# Altium PCB cuong.PcbDoc
Units mil, origin at the board's own origin, x right, y up, seen from the top; angles counter-clockwise.
Board outline 1885 x 2320 mil, 2 copper layers (Top Layer, Bottom Layer); 61 components, 49 nets, 228 pads, 113 vias.
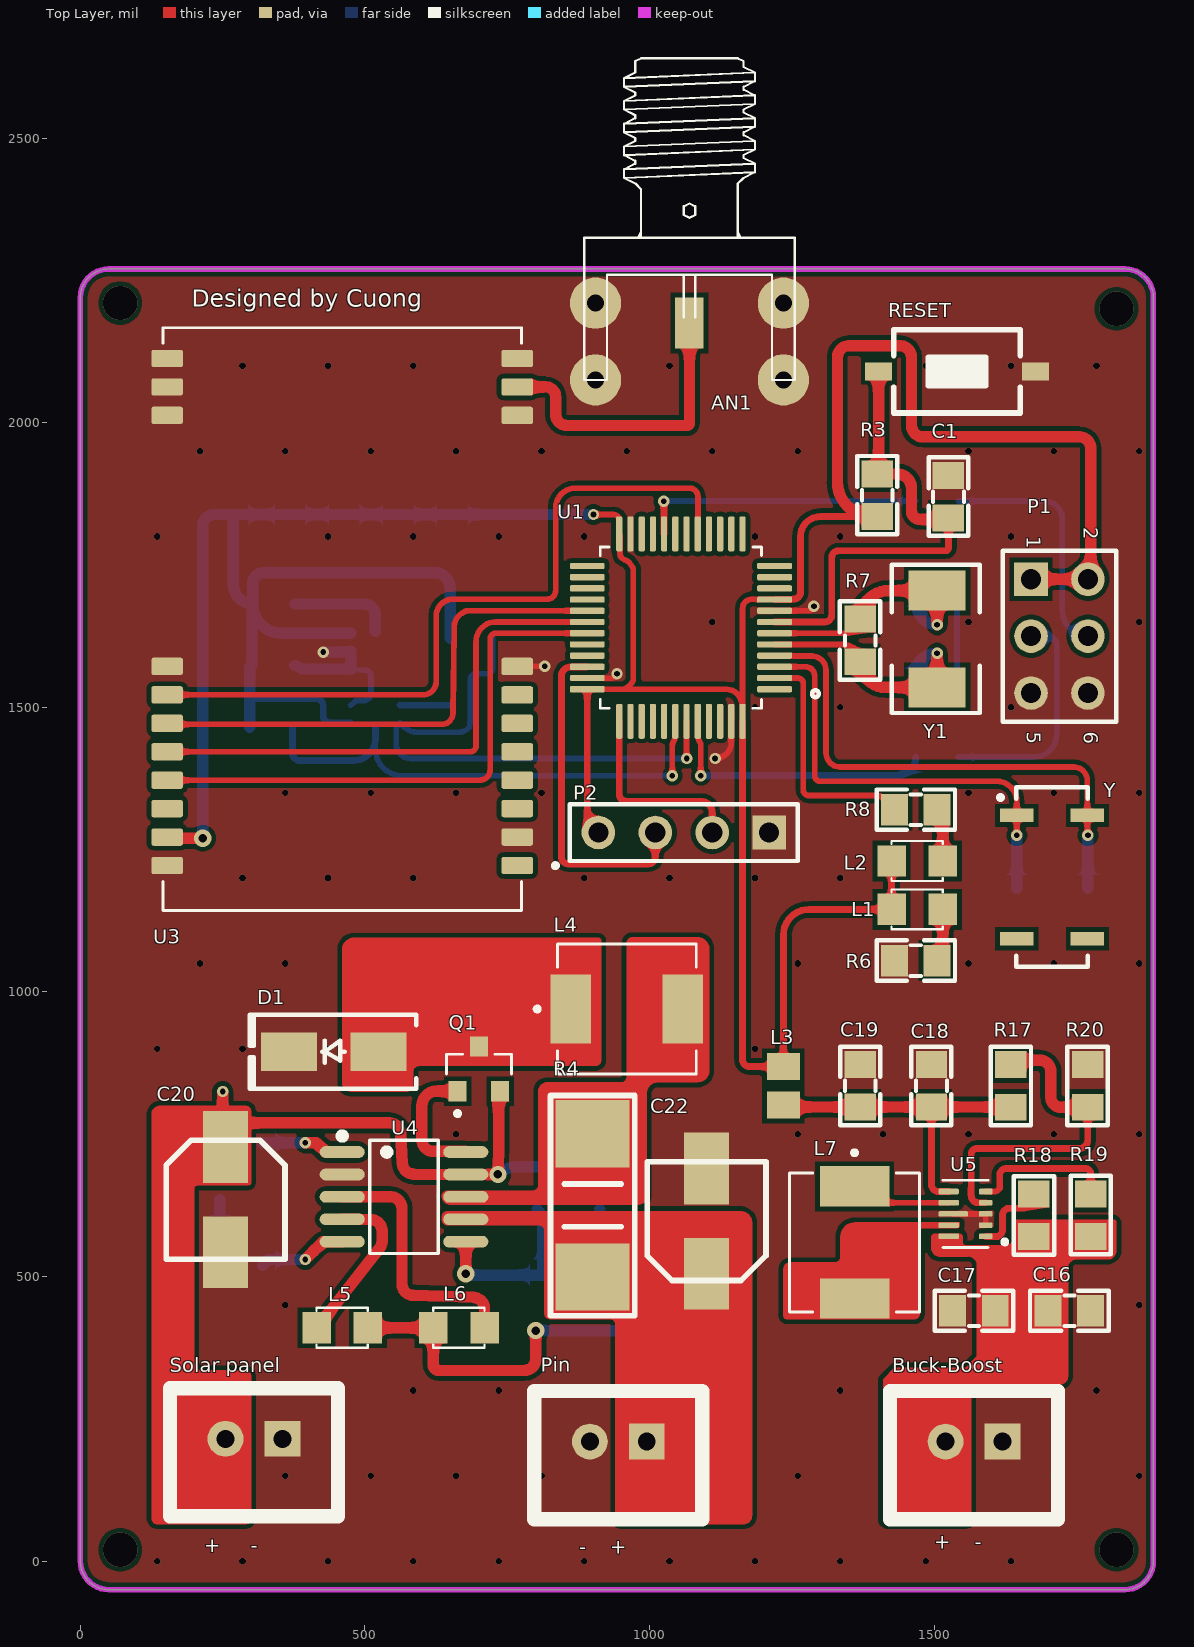
[diagram p0: Top Layer view]
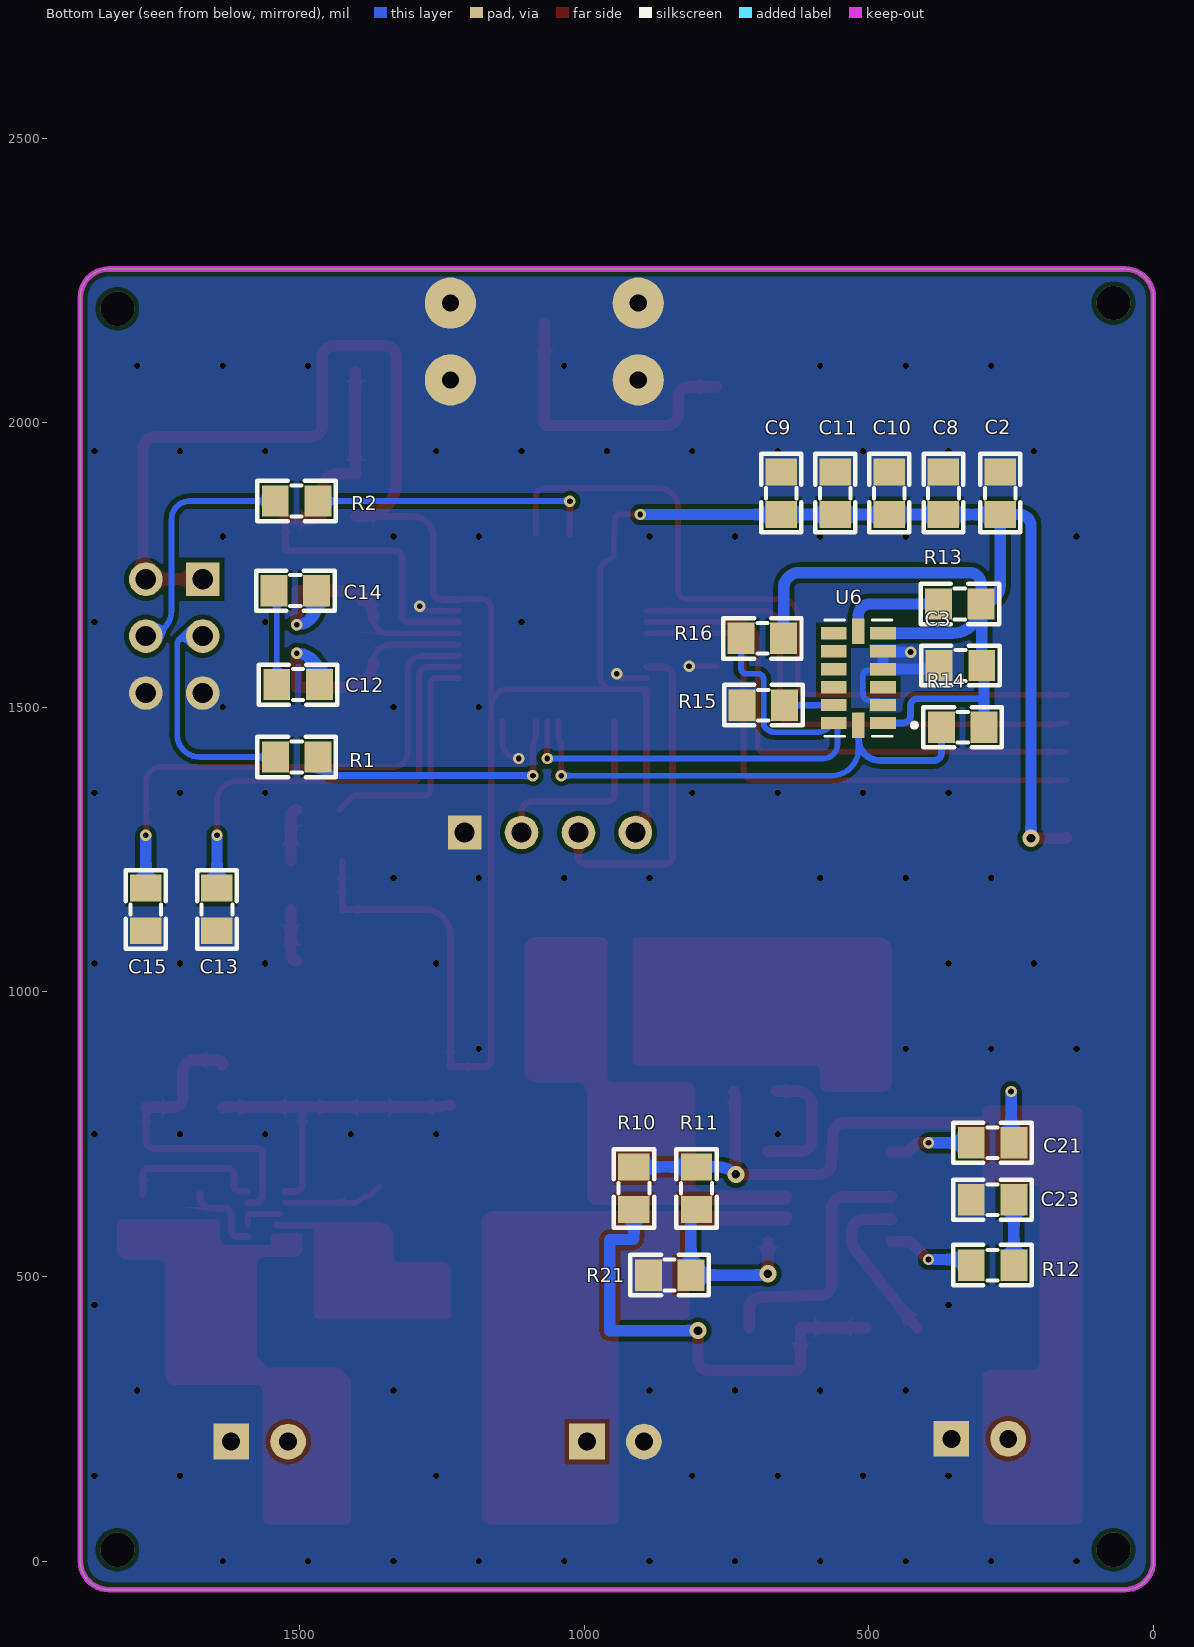
[diagram p1: Bottom Layer view, seen from below]
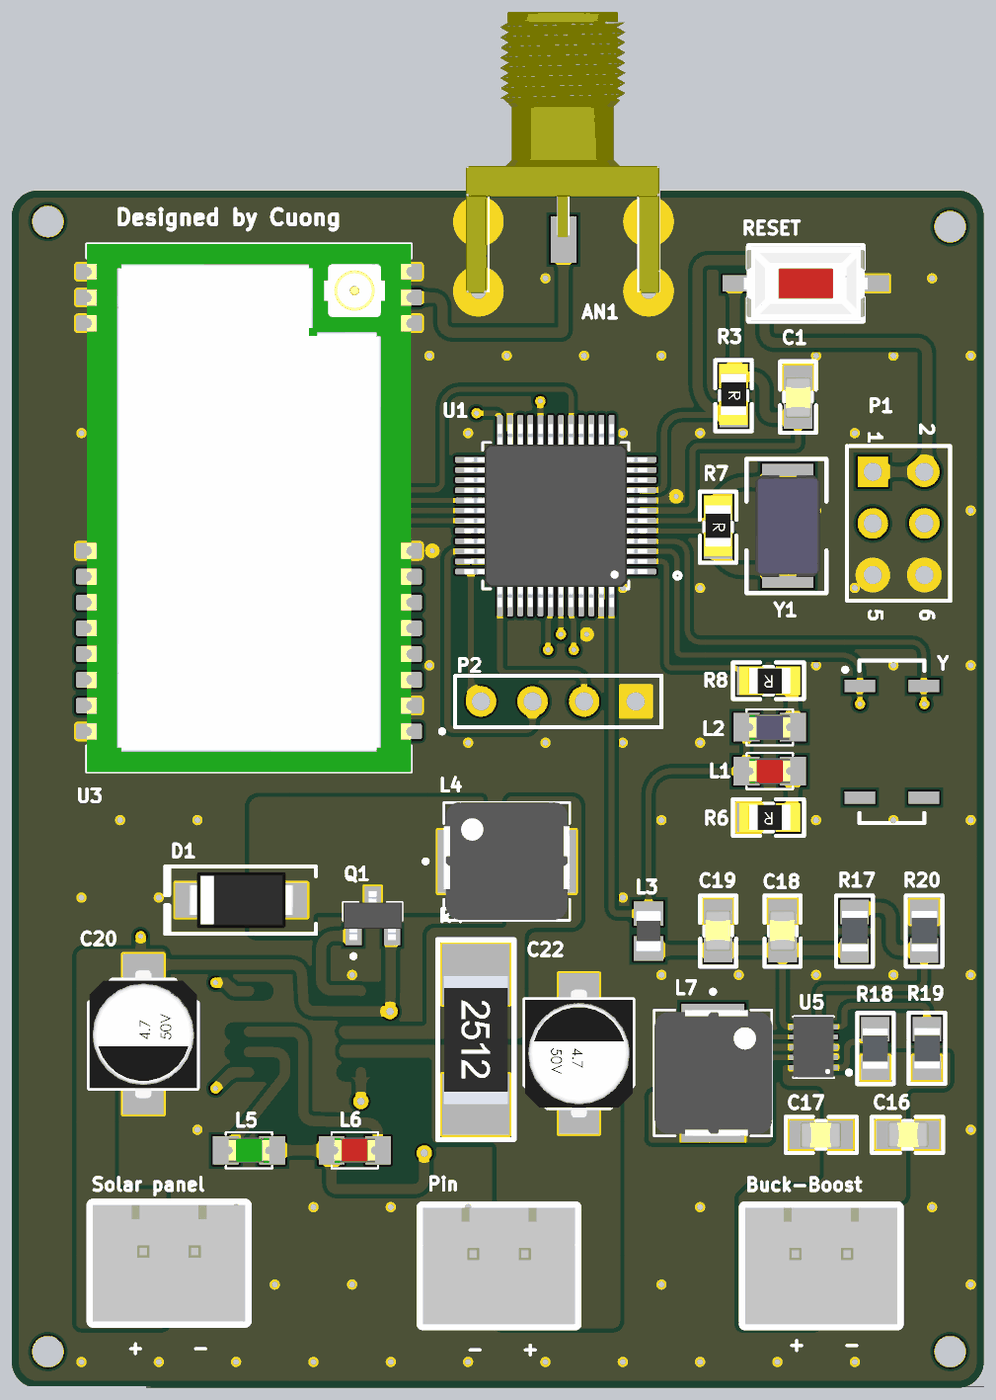
[diagram p2: 3D render of the assembled board from above, using the file's embedded part models]
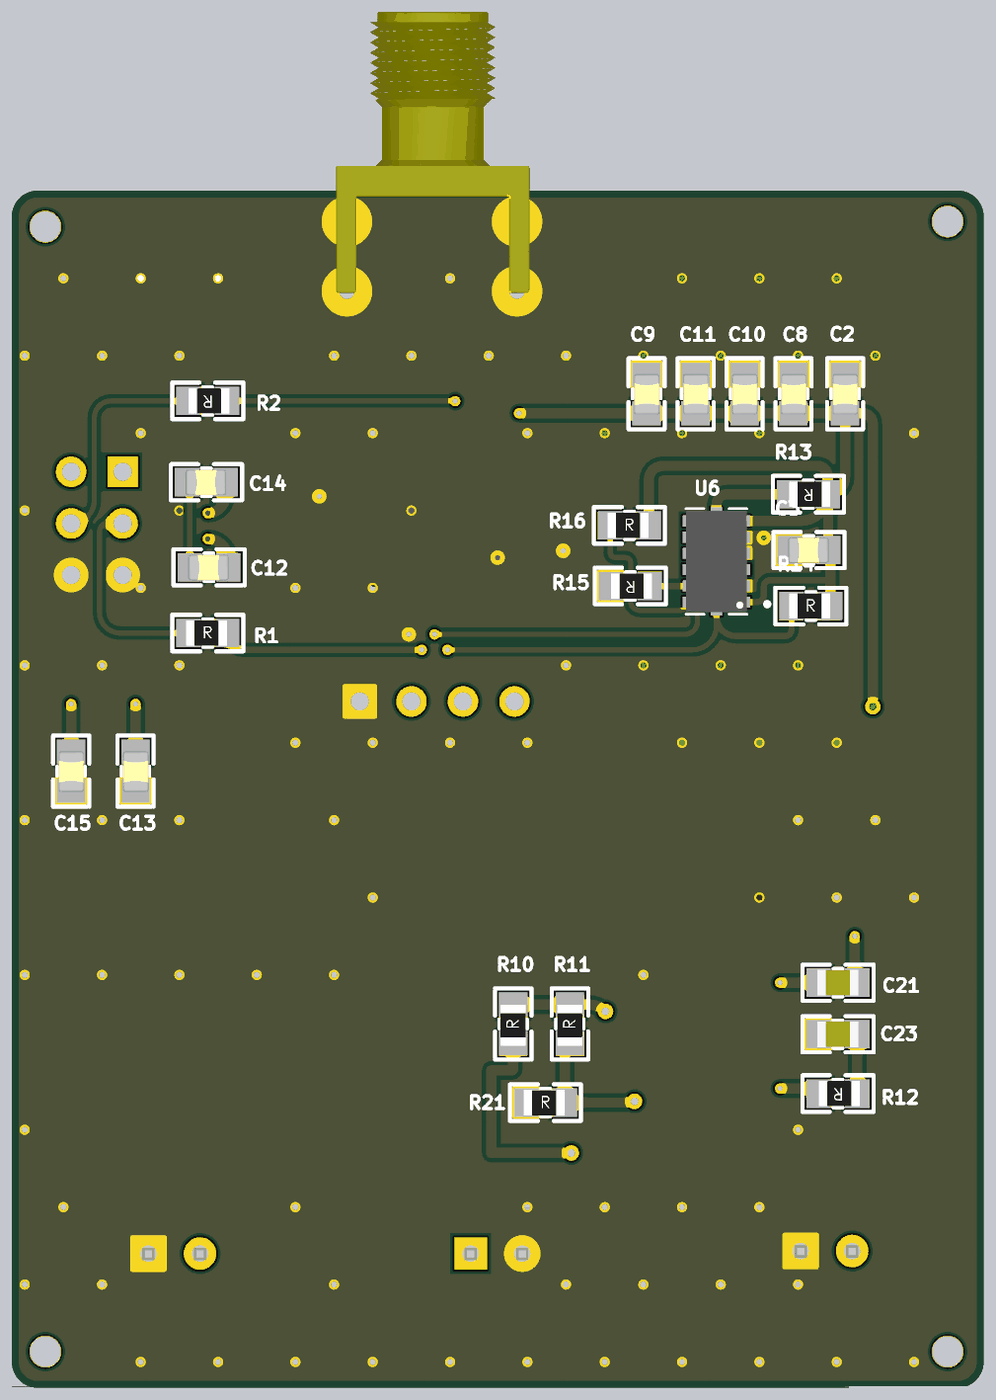
[diagram p3: 3D render of the assembled board from below, using the file's embedded part models]

## Layer stack, top to bottom
Top Solder: solder mask 0.4, Solder Resist, Dk 3.5
Top Layer: signal copper 1.4
Dielectric 1: dielectric 12.6, FR-4, Dk 4.8
Bottom Layer: signal copper 1.4
Bottom Solder: solder mask 0.4, Solder Resist, Dk 3.5

## Board outline
0,0 ccw(c50,0) 50,-50 1835,-50 ccw(c1835,0) 1885,0 1885,2220 ccw(c1835,2220) 1835,2270 50,2270 ccw(c50,2220) 0,2220

## Design rules (kind name [scope] priority, off if disabled: settings)
Clearance [All] p1: gap=8 ignorepadtopadclearanceinfootprint=FALSE
PlaneConnect [All] p1: planeconnectstyle=Direct reliefexpansion=20 reliefentries=4 reliefconductorwidth=10 reliefairgap=10
PolygonConnect [All] p1: connectstyle=Direct reliefconductorwidth=10 reliefentries=4 polygonreliefangle="90 Angle" airgapwidth=10
RoutingVias [All] p1: holewidth=15 width=30 viastyle="Through Hole" minholewidth=10 minwidth=20 maxholewidth=28 maxwidth=50
SolderMaskExpansion [All] p1: expansion=4 istentingtop=FALSE
Width [All] p1: maxlimit=20 minlimit=10 preferedwidth=12 minimp=50.000000 maximp=50.000000 favimp=50.000000
29 further rules are at their usual default settings.

## Classes and differential pairs
component class U_STM32_Schematic: C1 C2 C8 C9 C10 C11 C12 C13 C14 C15 L1 L2 P1 P2 R1 R2 R3 R6 R7 R8 RESET U1 Y Y1
component class U_POWER: Buck-Boost C16 C17 C18 C19 L3 L7 R17 R18 R19 R20 U5
component class U_LORA: AN1 U3
component class U_CN3791_solar: C20 C21 C22 C23 D1 L4 L5 L6 Pin Q1 R4 R10 R11 R12 R21 "Solar panel"
component class U_ADXL345: C3 R13 R14 R15 R16 U6

## Components (designator, comment, footprint, x,y, rotation, side; value= is the part's Value field where it differs from the comment)
AN1 "ANTENA" "De Anten SMA SMD" 1070,2175 r90 top
Buck-Boost "Header 2P" XH2.54M-2 1620,210 r180 top (schematic designator H1)
C1 "105" "Cap 0805" 1525,1870 r270 top
C2 "104" "Cap 0805" 268.76,1876.19 r270 bottom
C3 "0.1uF" "Cap 0805" 338.75,1573.38 r0 bottom
C8 "104" "Cap 0805" 368.76,1876.19 r270 bottom
C9 "104" "Cap 0805" 653.76,1876.19 r270 bottom
C10 "104" "Cap 0805" 463.76,1876.19 r270 bottom
C11 "104" "Cap 0805" 558.76,1876.19 r270 bottom
C12 "20pF" "Cap 0805" 1502.43,1539.87 r0 bottom
C13 "20pF" "Cap 0805" 1645,1145 r270 bottom
C14 "20pF" "Cap 0805" 1507.42,1704.87 r0 bottom
C15 "20pF" "Cap 0805" 1770,1145 r270 bottom
C16 "10uF" "Cap 0805" 1737.23,440.13 r0 top
C17 "0.1uF" "Cap 0805" 1570,440 r180 top
C18 "0.1uF" "Cap 0805" 1495,835 r90 top
C19 "22uF" "Cap 0805" 1370,835 r90 top
C20 "47uF" "tu nhom 5 (c)" 255,635 r270 top
C21 "100nF" "tu 0805" 282.42,734.87 r0 bottom
C22 "10uF" "tu nhom 5 (c)" 1100,597.48 r90 top
C23 "220nF" "tu 0805" 282.43,634.87 r0 bottom
D1 "SS34" "DIODE SMA" 445,895 r180 top
L1 "LED 0805" LED-0805-Red 1425,1145 r0 top
L2 "LED 0805" LED-0805-Blue 1425,1230 r0 top
L3 "FB 6A 25E" INDC2012X145N 1235,835 r90 top
L4 "10uH - 3A SMD" "CUON CAM SMD 0530" 960,970 r0 top
L5 "LED" LED-0805-Green 505,410 r180 top
L6 "LED 0805" LED-0805-Red 620,410 r0 top
L7 "470nH" "CUON CAM SMD 0530" 1360,560 r270 top
P1 "Header 3X2" HDR2X3 1670,1725 r270 top
P2 "ST-LINK" HDR1X4 1210,1280 r180 top
Pin "Header 2P" XH2.54M-2 995,210 r180 top (schematic designator H3)
Q1 "A5SHB" TRANS_MMFTP2319 700,865 r90 top
R1 "100K" "tro smd 0805" 1505,1415 r180 bottom
R2 "100K" "tro smd 0805" 1505,1860 r0 bottom
R3 "10K" "tro smd 0805" 1402.39,1872.57 r270 top
R4 "0.05R" "tro smd 2512" 900,625 r270 top
R6 "510R" "tro smd 0805" 1467.57,1052.61 r180 top
R7 "510R" "tro smd 0805" 1372.39,1617.57 r270 top
R8 "510R" "tro smd 0805" 1467.58,1317.61 r180 top
R10 "2K" "tro smd 0805" 915,655 r90 bottom
R11 "178K" "tro smd 0805" 805,655 r90 bottom
R12 "120" "tro smd 0805" 282.42,517.61 r0 bottom
R13 "4.7K" "tro smd 0805" 339.91,1679.09 r0 bottom
R14 "4.7K" "tro smd 0805" 335.24,1467.41 r180 bottom
R15 "4.7K" "tro smd 0805" 685.29,1501.22 r0 bottom
R16 "4.7K" "tro smd 0805" 687.07,1623.7 r180 bottom
R17 "511K" "RES 0805" 1635,835 r270 top
R18 "10K" "RES 0805" 1674.61,607.43 r90 top
R19 "100K" "RES 0805" 1775.39,607.77 r270 top
R20 "91K" "RES 0805" 1770,835 r270 top
R21 "22K" "tro smd 0805" 850,505 r180 bottom
RESET "Nut Nhan 2 Chan SMD 3x6x2.5" "Nut Nhan 2 Chan SMD 3x6x2.5" 1540,2090 r180 top (schematic designator BT1)
"Solar panel" "Header 2P" XH2.54M-2 355,215 r180 top (schematic designator H2)
U1 "STM32F103C8T6" QFP50P900X900X160-48N 1055,1640 r180 top
U3 "E32-433T20S" MODULE_E32-433T20S 460,1655 r180 top
U4 "CN3791" SSOP-10_L4.9-W3.9-P1.00-LS6.0-BL 17535.31,18555.05 r270 top
U5 "TPS63802DLAR" VREG_TPS63802DLAR 1555,610 r180 top
U6 "ADXL345BCCZ" IC_ADXL345BCCZ 518.21,1551.26 r0 bottom
Y "MC-306_32.7680K-A5:_ROHS" OSCL550P800X320X254-4N 1707.01,1201.73 r0 top
Y1 "8Mhz" "Thach Anh 2 chan SMD5032" 1505,1620 r90 top value=4Mhz

## Footprints (in the part's own frame and the unit in brackets; to place one, negate y for a bottom-side part, rotate by r counter-clockwise, add the part's x,y. Pads: shape width x height; smd on the part's side, far side on the other; paste and mask are expansions set on the pad)
"Cap 0805" [mm] "Compoment SMD 80x50mil"
  rect 1.2x1.4 smd: 1(-0.946,-0.003) 2(0.954,-0.003)
  silkscreen extent -1.75,-0.89 1.75,0.89, body extent -0.97,-0.61 1.03,0.64, height 1.23
"CUON CAM SMD 0530" [mm] "CUON CAM SMD 0530"
  rect 1.8x3.1 smd: 1(-2.5,0) 2(2.5,0)
  silkscreen extent -4.1,-2.9 3.1,2.9, body extent -3.1,-2.88 3.1,2.92, height 3
"De Anten SMA SMD" [mil]
  rect 90x50 smd: 1(0,0)
  round 90 hole 30: 2(-100,165) 3(-100,-165) 4(35,-165) 5(35,165)
  silkscreen extent -100,-185 465,185, body extent -103,-186 441,189, height 156
"DIODE SMA" [mm] "SMA"
  rect 2.5x1.7 smd: 1(-2,0) 2(2,0)
  silkscreen extent -3.68,-1.65 3.75,1.65, body extent -2.6,-1.37 2.6,1.37, height 2.4
HDR1X4 [mm] "Connector; Header; 4 Position"
  rect 1.5x1.5 hole 0.9: 1(0,0)
  round 1.5 hole 0.9: 2(2.54,0) 3(5.08,0) 4(7.62,0)
  silkscreen extent -1.27,-1.27 8.89,1.27
HDR2X3 [mm] "Connector; Header; 3x2 Position"
  rect 1.5x1.5 hole 0.9: 1(0,0)
  round 1.5 hole 0.9: 2(0,2.54) 3(2.54,0) 4(2.54,2.54) 5(5.08,0) 6(5.08,2.54)
  silkscreen extent -1.27,-1.27 6.35,3.81
IC_ADXL345BCCZ [mm]
  rect 1.145x0.55 smd: 1(-1.098,2) 2(-1.098,1.2) 3(-1.098,0.4) 4(-1.098,-0.4) 5(-1.098,-1.2) 6(-1.098,-2) 8(1.097,-2) 9(1.097,-1.2) 10(1.097,-0.4) 11(1.097,0.4) 12(1.097,1.2) 13(1.097,2)
  rect 0.55x1.145 smd: 7(0,-2.097) 14(0,2.097)
  silkscreen extent -2.6,-2.6 1.5,2.6, body extent -1.5,-2.5 1.5,2.5, height 1
INDC2012X145N [mm]
  rect 1.2x1.47 smd: 1(-0.86,0) 2(0.86,0)
  body extent -1,-0.63 1,0.63, height 1.45
LED-0805-Blue [mil]
  rect 50x55 smd: 1(0,0) 2(90,0)
  silkscreen extent 0,-35 90,35, body extent 5,-25 85,25, height 43
LED-0805-Green [mil]
  rect 50x55 smd: 1(0,0) 2(90,0)
  silkscreen extent 0,-35 90,35, body extent 5,-25 85,25, height 43
LED-0805-Red [mil]
  rect 50x55 smd: 1(0,0) 2(90,0)
  silkscreen extent 0,-35 90,35, body extent 5,-25 85,25, height 43
MODULE_E32-433T20S [mm]
  rrect25% 1.41x0.77 smd: 1(-7.81,11) 2(-7.81,9.73) 3(-7.81,8.46) 4(-7.81,7.19) 5(-7.81,5.92) 6(-7.81,4.65) 7(-7.81,3.38) 8(-7.81,2.11) 11(-7.81,-9.09) 12(-7.81,-10.36) 13(-7.81,-11.63) 14(7.81,-11.63) 15(7.81,-10.36) 16(7.81,-9.09) 19(7.81,2.11) 20(7.81,3.38) 21(7.81,4.65) 22(7.81,5.92) 23(7.81,7.19) 24(7.81,8.46) 25(7.81,9.73) 26(7.81,11)
  silkscreen extent -9.61,-13 8,13, body extent -8,-13 8,13, height 3.25
"Nut Nhan 2 Chan SMD 3x6x2.5" [mm] "Switch SMD type"
  rect 1.2x0.8 smd: 1(-3.5,0) 2(3.5,0)
  silkscreen extent -2.82,-1.85 2.82,1.85, body extent -3.05,-1.85 3.05,1.85, height 2.5
OSCL550P800X320X254-4N [mm]
  rect 1.5x0.6 smd: 1(-1.575,2.75) 2(-1.575,-2.75) 3(1.575,-2.75) 4(1.575,2.75)
  silkscreen extent -2.4,-4 1.6,4
QFP50P900X900X160-48N [mm]
  rrect50% 1.56x0.28 smd: 1(-4.18,2.75) 2(-4.18,2.25) 3(-4.18,1.75) 4(-4.18,1.25) 5(-4.18,0.75) 6(-4.18,0.25) 7(-4.18,-0.25) 8(-4.18,-0.75) 9(-4.18,-1.25) 10(-4.18,-1.75) 11(-4.18,-2.25) 12(-4.18,-2.75) 25(4.18,-2.75) 26(4.18,-2.25) 27(4.18,-1.75) 28(4.18,-1.25) 29(4.18,-0.75) 30(4.18,-0.25) 31(4.18,0.25) 32(4.18,0.75) 33(4.18,1.25) 34(4.18,1.75) 35(4.18,2.25) 36(4.18,2.75)
  rrect50% 0.28x1.56 smd: 13(-2.75,-4.18) 14(-2.25,-4.18) 15(-1.75,-4.18) 16(-1.25,-4.18) 17(-0.75,-4.18) 18(-0.25,-4.18) 19(0.25,-4.18) 20(0.75,-4.18) 21(1.25,-4.18) 22(1.75,-4.18) 23(2.25,-4.18) 24(2.75,-4.18) 37(2.75,4.18) 38(2.25,4.18) 39(1.75,4.18) 40(1.25,4.18) 41(0.75,4.18) 42(0.25,4.18) 43(-0.25,4.18) 44(-0.75,4.18) 45(-1.25,4.18) 46(-1.75,4.18) 47(-2.25,4.18) 48(-2.75,4.18)
  silkscreen extent -6.15,-3.6 3.6,3.6, body extent -4.5,-4.5 4.5,4.5, height 1.6
"RES 0805" [mm]
  rect 1.2x1.4 smd: 1(-0.946,-0.01) 2(0.954,-0.01)
  silkscreen extent -1.75,-0.91 1.75,0.89, body extent -1,-0.62 1,0.63, height 0.5
SSOP-10_L4.9-W3.9-P1.00-LS6.0-BL [mm]
  oval 0.525x2.014 smd paste+0 mask+0.051: 1(453.042,-433.713) 2(454.042,-433.713) 3(455.042,-433.713) 4(456.042,-433.713) 5(457.042,-433.713) 6(457.042,-428.199) 7(456.042,-428.199) 8(455.042,-428.199) 9(454.042,-428.199) 10(453.042,-428.199)
  silkscreen extent 452.18,-433.86 457.57,-429.43
"Thach Anh 2 chan SMD5032" [mil] "DO-214-AA/SMB; 2 C-Bend Leads; Body 5.3 x 3.6 mm, inc. leads (LxW)"
  rect 70x100 smd: 1(-85,0) 2(85,0)
  silkscreen extent -130,-75 130,80, body extent -98,-63 98,63, height 51
TRANS_MMFTP2319 [mm]
  rect 0.9x0.8 smd: 1(-1,0.95) 2(-1,-0.95) 3(1,0)
  silkscreen extent -2.1,-1.45 0.65,1.45, body extent -1.2,-1.45 1.2,1.45, height 1.2
"tro smd 0805" [mm]
  rect 1.2x1.4 smd: 1(-0.946,-0.061) 2(0.954,-0.061)
  silkscreen extent -1.75,-0.97 1.75,0.84, body extent -1.56,-0.76 1.44,0.64, height 0.53
"tro smd 2512" [mm]
  rect 3x3.3 smd: 1(-3.2,0) 2(3.2,0)
  silkscreen extent -4.9,-1.88 4.93,1.88, body extent -3.12,-1.57 3.18,1.58, height 0.82
"tu 0805" [mm] "Compoment SMD 80x50mil"
  rect 1.2x1.4 smd: 1(-0.946,-0.003) 2(0.954,-0.003)
  silkscreen extent -1.75,-0.89 1.75,0.89, body extent -1.01,-0.64 1.01,0.63, height 0.61
"tu nhom 5 (c)" [mm]
  rect 3.2x2 smd: 1(-2.35,0) 2(2.35,0)
  silkscreen extent -2.65,-2.65 2.65,2.65, body extent -3.15,-2.65 3.15,2.65, height 5.7
VREG_TPS63802DLAR [mm]
  rrect40% 0.6x0.25 smd mask+0: 1(-0.9,1) 2(-0.9,0.5) 3(-0.9,0) 4(-0.9,-0.5) 5(-0.9,-1)
  rrect40% 0.9x0.25 smd mask+0: 6(0.75,-1) 7(0.75,-0.5) 9(0.75,0.5) 10(0.75,1)
  rrect40% 1.3x0.25 smd paste-2 mask+0: 8(0.55,0)
  silkscreen extent -1.85,-1.5 1,1.5, body extent -1,-1.5 1,1.5, height 1
XH2.54M-2 [mm]
  rect 1.6x1.6 hole 0.8: 1(0,0)
  round 1.6 hole 0.8: 2(2.54,0)
  silkscreen extent -2.48,-2.26 5.02,3.46, body extent -2.48,-2.26 5.02,3.48, height 6.91

## Part data
AN1: library part "ANTEN SMA THANG", "Generic Antenna"
Buck-Boost Pin "Solar panel": library part "Header 2P 2.54 Duc Thang", "Cắm", Chung_Loai=Cắm, Don_Vi=Con, Ma_Hang=MH001283, Ten_Linh_Kien="Header 2P XH2.54-2P Đực Thẳng"
C1 C2 C3 C8 C9 C10 C11 C12 C13 C14 C15 C16 C17 C18 C19: library part "Cap 0805", "Capacitor SMD 0805"
C20 C22: library part "Tu Nhom 10uF 20V", "Dán", Chung_Loai=Dán, Don_Vi=Con, Ma_Hang=MH004016, So_Chan=2, Ten_Linh_Kien="Tụ Nhôm 10uF 20V"
C21 C23: library part "Tu 0805 33nF 50V 20%", "Dán", Chung_Loai=Dán, Don_Vi=Con, Ma_Hang=MH007854, So_Chan=2, Ten_Linh_Kien="Tụ 0805 33nF 50V 20%"
D1: library part "Diode SS34 ( 1N5822 )", "Dán", Chung_Loai=Dán, Don_Vi=Con, Ma_Hang=MH002104, Ten_Linh_Kien="Diode SS34 3A 40V SMA ( 1N5822 SS34A)"
L1 L6: library part "LED 0805 Do", "Dán", Chung_Loai=Dán, Don_Vi=Con, Ma_Hang=MH000897, Ten_Linh_Kien="LED 0805 Màu Đỏ (Red)"
L2: library part "LED 0805 Xanh Duong", "Dán", Chung_Loai=Dán, Don_Vi=Con, Ma_Hang=MH002327, Ten_Linh_Kien="LED 0805 Màu Xanh Dương (Blue)"
L3: library part MLZ2012N220LT000, "22 ÂµH Shielded Multilayer Inductor 300 mA 670mOhm 0805 (2012 Metric)", Package="2012 Bourns", Check_prices=https://www.snapeda.com/parts/MLZ2012N220LT000/TDK/view-part/?ref=eda, MF=TDK, MP=MLZ2012N220LT000, SnapEDA_Link=https://www.snapeda.com/parts/MLZ2012N220LT000/TDK/view-part/?ref=snap
L4: library part "CUON CAM 100uH SMD", "Dán", Chung_Loai=Dán, Don_Vi=Con, Ten_Linh_Kien="Cuộn Cảm 100uH 7x7x4MM CD74"
L5: library part "LED 0805 Xanh La", "Dán", Chung_Loai=Dán, Don_Vi=Con, Ma_Hang=MH002326, Ten_Linh_Kien="LED 0805 Màu Xanh Lá (Green)"
L7: library part "Cuon Cam SMD 0530", "SMD 0530", Package=None, Availability=Unavailable, MP=FDV0530-H-1R5M=P3, Price=None
P1: "Header, 3-Pin, Dual row", LatestRevisionDate=17-Jul-2002, LatestRevisionNote="Re-released for DXP Platform.", Publisher="Altium Limited"
P2: library part "Header 4", "Header, 4-Pin", LatestRevisionDate=17-Jul-2002, LatestRevisionNote="Re-released for DXP Platform.", Publisher="Altium Limited"
Q1: library part MMFTP2319, "MOSFET, SOT-23, P, -40V, -4.2A, 0.08â„", Package="SOT-23 Diotec", Check_prices=https://www.snapeda.com/parts/MMFTP2319/Diotec/view-part/?ref=eda, MF="Diotec Semiconductor", MP=MMFTP2319, SnapEDA_Link=https://www.snapeda.com/parts/MMFTP2319/Diotec/view-part/?ref=snap
R1 R2 R3 R6 R7 R8 R13 R14 R15 R16: library part "Tro 0805 1% 0.5R", "Dán", Chung_Loai=Dán, Don_Vi=Con, Ma_Hang=MH005465, So_Chan=2, Ten_Linh_Kien="Trở 0805 1% 0.5R"
R4: library part "Tro 2512 5% 0.5R", "Dán", Chung_Loai=Dán, Don_Vi=Con, Ma_Hang=MH003431, So_Chan=2, Ten_Linh_Kien="Trở 2512 5% R500-0.5R 1W"
R10 R11 R12 R21: library part "Tro 0805 1% 1k", "Dán", Chung_Loai=Dán, Don_Vi=Con, Ma_Hang=MH005468, So_Chan=2, Ten_Linh_Kien="Trở 0805 1% 1k"
R17 R18 R19 R20: library part "RES 0805", "RES SMD 0805", Manufacturer="Vishay Dale", Manufacturer Part Number=CRCW040210K0FKED, Operating Temperature="-55°C ~ 155°C", Package / Case="0402 (1005 Metric)", Power (Watts)="0.063W, 1/16W", Resistance (Ohms)=10k, Supplier Part Number 1=541-10.0KLCT-ND, Temperature Coefficient=±100ppm/°C, Tolerance=±1%, Category=Resistors, ComponentLink1Description=http://www.vishay.com/docs/20035/dcrcwe3.pdf, ComponentLink1URL=http://www.vishay.com/docs/20035/dcrcwe3.pdf, Composition="Thick Film", Features="Automotive AEC-Q200", Height="0.016\" (0.40mm)", Number of Terminations=2, Packaging="Cut Tape (CT)", Pricing 1="10=0.083, 50=0.0444, 200=0.0255, 1000=0.0174 (USD)", RoHS="RoHS Compliant", Size / Dimension="0.039\" L x 0.020\" W (1.00mm x 0.50mm)", Stock 1=2392462, Supplier 1=Digi-Key, Supplier Device Package="0402 (1005 Metric)"
U1: "ARM® Cortex®-M3 STM32F1 Microcontroller IC 32-Bit 72MHz 64KB (64K x 8) FLASH 48-LQFP (7x7)", Package="LQFP-48 STMicroelectronics", Check_prices=https://www.snapeda.com/parts/STM32F103C8T6/STMicroelectronics/view-part/?ref=eda, MF=STMicroelectronics, MP=STM32F103C8T6, SnapEDA_Link=https://www.snapeda.com/parts/STM32F103C8T6/STMicroelectronics/view-part/?ref=snap
U3: "Wireless serial port module (UART)", Package=Package, Availability="Not in stock", Check_prices=https://www.snapeda.com/parts/E32-433T20S/EBYTE/view-part/?ref=eda, MF=EBYTE, MP=E32-433T20S, Price=None, SnapEDA_Link=https://www.snapeda.com/parts/E32-433T20S/EBYTE/view-part/?ref=snap
U5: "2-A, high-efficient, 11-ÂµA quiescent current buck-boost converter in QFN/DFN package", Package="VSON-HR-10 Texas Instruments", Check_prices=https://www.snapeda.com/parts/TPS63802DLAR/Texas+Instruments/view-part/?ref=eda, MF="Texas Instruments", MP=TPS63802DLAR, SnapEDA_Link=https://www.snapeda.com/parts/TPS63802DLAR/Texas+Instruments/view-part/?ref=snap
U6: "3-Axis, Â±2 g/Â±4 g/Â±8 g/Â±16 g Digital Accelerometer", Package="LGA -14 Analog Devices", Check_prices=https://www.snapeda.com/parts/ADXL345BCCZ/Analog+Devices/view-part/?ref=eda, MF="Analog Devices", MP=ADXL345BCCZ, SnapEDA_Link=https://www.snapeda.com/parts/ADXL345BCCZ/Analog+Devices/view-part/?ref=snap
Y: "32.768kHz Â±100ppm Crystal 12.5pF 50 kOhms 4-SOJ, 5.50mm pitch", Package="4-4 Epson", Availability=Unavailable, MF=EPSON, MP="MC-306 32.7680K-A5: ROHS", Price=None, SnapEDA_Link=https://www.snapeda.com/parts/MC-306%2032.7680K-A5%3A%20ROHS/EPSON/view-part/620500/?ref=snap
Y1: library part "Thach Anh 2 chan SMD 5032", "Crystal For all Crystal 2pin."
RESET: Ma_Hang=MH001036, Ten="Nút Nhấn 2 Chân 3x6x2.5MM SMD"

## Via types
v1: diameter 11.81, hole 11.81, Top Layer to Bottom Layer, 88 vias
v2: diameter 20, hole 10, Top Layer to Bottom Layer, 17 vias
v3: diameter 30, hole 15, Top Layer to Bottom Layer, 4 vias
v4: diameter 60, hole 60, Top Layer to Bottom Layer, 4 vias

## Nets (pads, with @x,y where several pads share a name; then routed paths per layer and width w, separated by ;. In a path a pad name is that pad's centre, name@x,y a point inside that pad or via, vN(x,y) a via of type N, cw(c..) or ccw(c..) an arc to the next point about the centre after c; other vN are vias at no path point)
BOOT0: R1.2 U1.44 | length 492.6
  Top Layer w10: U1.44 cw(c1074.53,1475.23) 1084.53,1475.29 1084.53,1451.37 1084.53,1451.3 ccw(c1107.27,1451.36) 1088.35,1438.74 cw(c1080,1433.23) 1090,1433.28 v2(1090,1380)
  Bottom Layer w12: v2(1090,1380) 1434.82,1380 ccw(c1434.82,1412.61) R1.2
BOOT1: R2.1 U1.20 | length 500.6
  Top Layer w12: v2(1025,1862) 1025.3,1832.69 cw(c1008.54,1832.52) 1025.3,1832.62 U1.20
  Bottom Layer w10: v2(1025,1862) 1025,1862.39 R2.1
GND: "Solar panel.1" AN1.2 AN1.3 AN1.4 AN1.5 Buck-Boost.1 C1.1 C2.1 C3.2 C8.1 C9.1 C10.1 C11.1 C13.2 C15.2 C16.2 C17.2 C18.2 C19.2 C20.2 C22.2 C23.2 D1.2 P1.5 P1.6 P2.1 Pin.2 R6.2 R15.2 R20.1 R21.1 RESET.1 U1.8 U1.23 U1.35 U1.47 U3.2 U3.8 U3.11 U3.13 U3.14 U3.15 U3.16 U3.19 U3.26 U4.2 U5.2 U5.3 U5.8 U6.2 U6.4 U6.5 | length 637.9
  Top Layer w10: U3.8 v2(815.67,1571.93) ccw(c815.67,1574.53) v2@818.27,1574.53 ; U1.35 893,1551.01 893.59,1550.92 ccw(c895.13,1560.8) 894.76,1550.81 894.95,1550.8 931.41,1550.8 ccw(c931.41,1560.8) 933.98,1551.14 ccw(c930.36,1564.62) 940.59,1555.12 ccw(c933.25,1561.91) 942.58,1558.3 v2(942.73,1558.68) ; v2(1115,1410) ccw(c1115,1438.58) 1143.58,1438.58 U1.47 ; U1.8 U1.8@1245.27,1669.02 ; U1.8@1245.28,1669.02 1245.28,1669.53 cw(c1245.4,1659.53) 1245.35,1669.53 1278.51,1669.53 ccw(c1278.49,1679.53) 1287.36,1674.92 v2(1288.68,1677.46) ; U5.8 U5.3 U5.2
  Bottom Layer w10: U6.2 482.65,1509.84 482.65,1511.47 cw(c484.72,1501.69) 484.68,1511.69 497.54,1511.69 ccw(c497.54,1524.69) 510.54,1524.69 510.54,1555.04 ccw(c500.54,1555) 500.54,1565 492.54,1565 U6.4
  Bottom Layer w20: C3.2 389.95,1567.32 462.46,1567.32 U6.4 U6.5 462.46,1597.89 455,1597.89 ccw(c455,1577.89) 454.4,1597.88 v2(426.53,1597.05)
  other v1: 135,0 285,0 435,0 585,0 735,0 885,0 1035,0 1185,0 1335,0 1485,0 1635,0 360,150 510,150 660,150 810,150 1260,150 1710,150 1860,150 435,300 585,300 735,300 885,300 1335,300 1785,300 360,450 1860,450 660,750 1260,750 1410,750 1560,750 1710,750 1860,750 135,900 285,900 435,900 1185,900 210,1050 360,1050 1260,1050 1560,1050 1710,1050 1860,1050 285,1200 435,1200 585,1200 885,1200 1035,1200 1185,1200 1335,1200 360,1350 510,1350 660,1350 810,1350 1560,1350 1710,1350 1860,1350 1185,1500 1335,1500 1635,1500 1110,1650 1560,1650 1860,1650 135,1800 435,1800 585,1800 735,1800 885,1800 1185,1800 1335,1800 1635,1800 210,1950 360,1950 510,1950 660,1950 810,1950 960,1950 1110,1950 1260,1950 1560,1950 1710,1950 1860,1950 285,2100 435,2100 585,2100 1035,2100 1485,2100 1635,2100 1785,2100
NetAN1_1: AN1.1 U3.12 | length 532
  Top Layer w20: U3.12 817.13,2062.87 cw(c817.13,2045) 835,2045 835,2015 ccw(c855,2015) 855,1995 1065,1995 ccw(c1065,2000) 1070,2000 AN1.1
NetC12_2: C12.2 C14.2 | length 167.9
  Bottom Layer w10: C12.2 1540,1700 cw(c1545,1700) C14.2
NetC18_1: C18.1 C19.1 L3.1 R17.2 U5.6 | length 573.8
  Top Layer w12: C18.1 1495.13,661.3 ccw(c1507.13,661.37) 1507.08,649.37 U5.6
  Top Layer w20: L3.1 1253.94,797.77 C18.1 1634.61,797.77 R17.2
NetC20_1: "Solar panel.2" C20.1 C21.1 Q1.2 R10.2 R11.2 U4.9 | length 1088.6
  Top Layer w20: v2(250,825) 250,780.51 C20.1 284.37,770 542.75,770 cw(c542.75,750) 562.72,751.09 565.62,698.8 ccw(c585.59,699.96) 585.4,679.96 647.76,679.37 U4.9 v3(733.48,679.37) 734.69,717.85 ccw(c706.37,718.74) 734.7,718.77 734.7,817.91 Q1.2
  Bottom Layer w20: C21.1 250,752.56 v2(250,825) ; v3(733.48,679.37) cw(c765.36,647.49) 765.36,692.57 R11.2 ; R11.2 R10.2
NetC21_2: C21.2 U4.1 | length 146.7
  Top Layer w20: v2(395,735) 414.26,735 430.52,718.74 U4.1
  Bottom Layer w20: C21.2 v2(395,735)
NetC22_1: C22.1 Pin.1 R4.2 U4.7
NetC23_1: C23.1 R12.1 | length 115
  Bottom Layer w20: R12.1 C23.1
NetD1_1: D1.1 L4.1 Q1.3
NetL1_2: L1.2 R6.1 | length 95.8
  Top Layer w20: R6.1 ccw(c1504.8,1065.2) 1515,1065.2 L1.2
NetL2_2: L2.2 R8.1 | length 95.8
  Top Layer w20: R8.1 cw(c1504.8,1309.8) 1515,1309.8 L2.2
NetL4_2: L4.2 R4.1 U4.8
NetL5_1: L5.1 L6.1 R10.1 | length 836.3
  Top Layer w20: L5.1 L6.1 620,345 ccw(c630,345) 630,335 780,335 ccw(c780,355) 800,355 v3(800,405)
  Bottom Layer w20: v3(800,405) 955,405 955,565 915,565 cw(c915,567.39) 912.61,567.39 R10.1
NetL5_2: L5.2 U4.4 | length 291.2
  Top Layer w20: L5.2 430,427.5 525.74,549.56 ccw(c510,561.91) 530,561.91 530,580.18 ccw(c510,580.18) 510.43,600.17 489.3,600.63 U4.4
NetL6_2: L6.2 U4.3 | length 450.8
  Top Layer w20: U4.3 545,640 cw(c545,620) 565,620 565,486.89 ccw(c585,486.98) 584.26,466.99 690.66,463.5 cw(c690,443.51) 710,443.51 L6.2
NetL7_1: L7.1 U5.7 | length 175.3
  Top Layer w10: L7.1 1374.62,643.81 1374.65,643.77 ccw(c1381.69,650.88) 1380,641.02 cw(c1374.6,607.88) L7.1@1397.56,632.39 ; L7.1@1397.59,632.36 ccw(c1404.39,639.68) 1404.35,629.68 U5.7
NetL7_2: L7.2 U5.9 | length 282.8
  Top Layer w10: L7.2@1355,471.57 1355,575 cw(c1370,575) 1370,590 1525.47,590 U5.9
NetP1_3: P1.3 R1.1 | length 406.7
  Bottom Layer w10: R1.1 1675.21,1412.61 ccw(c1675.21,1452.4) 1715,1452.4 1715,1609.33 ccw(c1698.67,1609.33) 1697.96,1625.64 cw(c1697.6,1635.63) 1697.89,1625.64 1697.83,1625.64 P1.3
NetP1_4: P1.4 R2.2 | length 431.6
  Bottom Layer w10: R2.2 1692.61,1862.39 cw(c1692.61,1830) 1725,1830 1725,1670 ccw(c1770,1670) P1.4
NetQ1_1: Q1.1 U4.10 | length 226.4
  Top Layer w20: Q1.1 625.63,825.63 ccw(c625.63,800) 600,800 600,740 ccw(c620,740) 620,720 675.81,720 cw(c675.81,718.74) U4.10
NetR11_1: R11.1 R21.2 U4.6 | length 315.6
  Top Layer w20: v3@675,500 ccw(c670.01,504.99) v3(677.07,504.99) U4.6
  Bottom Layer w20: v3(677.07,504.99) ccw(c682.82,510.74) 682.82,502.61 R21.2 812.42,594.07 ccw(c778.9,594.07) R11.1
NetR12_2: R12.2 U4.5 | length 157.1
  Top Layer w20: v2(395,530) 425.93,560.93 430.18,560.93 430.52,561.26 U4.5
  Bottom Layer w20: R12.2 330,530 v2(395,530)
NetR13_2: R13.2 U6.7 | length 179.8
  Bottom Layer w20: R13.2 498.21,1681.49 cw(c498.21,1661.49) 518.21,1661.49 U6.7
NetR14_1: R14.1 U1.42 U6.14 | length 907.2
  Top Layer w10: v2(1040,1380) 1040,1433.76 cw(c1050,1433.72) 1041.53,1439.03 ccw(c1021.88,1451.51) 1045.16,1451.51 1045.16,1475.29 ccw(c1035.16,1475.23) U1.42
  Bottom Layer w10: 518.21,1444.75 518.21,1426.79 ccw(c565,1426.79) 565,1380 v2(1040,1380)
  Bottom Layer w12: R14.1 372.46,1419.45 ccw(c385.29,1419.45) 385.29,1406.63 480.08,1406.63 ccw(c480.08,1444.75) 518.21,1444.75 U6.14
NetR15_1: R15.1 U6.12 | length 87
  Bottom Layer w12: U6.12 561.42,1503.61 R15.1
NetR16_1: R16.1 U1.43 U6.13 | length 942
  Top Layer w10: U1.43 1064.84,1440 ccw(c1074.84,1440) 1064.84,1439.95 v2(1065,1410)
  Bottom Layer w10: U6.13@557.93,1469.03 ccw(c565,1461.96) 555,1461.96 555,1435 ccw(c580,1435) 580,1410 v2(1065,1410) ; U6.13 567.96,1465.98 ccw(c591.78,1489.8) 591.78,1456.11 664.75,1456.11 ccw(c664.75,1478.7) 681.89,1464 ccw(c674.3,1470.51) 684.3,1470.46 684.3,1471.91 cw(c694.3,1471.86) 684.46,1473.65 ccw(c671.69,1476.05) 684.69,1476.05 684.69,1548.83 cw(c694.69,1548.83) 694.69,1558.83 715.23,1558.83 ccw(c715.23,1567.9) 724.3,1567.9 R16.1
NetR17_1: R17.1 R20.2 U5.4 | length 587.8
  Top Layer w12: U5.4 1577.21,629.68 cw(c1577.26,641.68) 1565.35,640.23 ccw(c1476.22,629.32) 1564.84,643.76 cw(c1580.59,646.42) 1564.62,646.42 1564.62,652.32 cw(c1580.59,652.32) 1564.84,654.98 ccw(c1553,656.91) 1565,656.86 1565,715 cw(c1575,715) 1575,725 1755,725 ccw(c1755,739.61) 1769.61,739.61 R20.2
  Top Layer w20: R17.1 cw(c1642.38,872.23) 1642.38,880 1685,880 cw(c1685,860) 1705,860 1705,815 ccw(c1722.57,815) 1722.57,797.43 R20.2
NetR18_2: R18.2 U5.1 | length 140.5
  Top Layer w12: U5.1 1596.07,570.5 1607.65,570.16 ccw(c1608,582.15) 1620,582.15 1620,608.05 cw(c1632,608) 1631.95,620 1654.93,620 ccw(c1654.92,640.08) 1675,640.08 R18.2
NetR19_1: R19.1 U5.5 | length 257.3
  Top Layer w10: U5.5 1606.05,649.37 ccw(c1606.01,659.37) 1615,655
  Top Layer w12: 1615,655 1615,678 cw(c1627,678) 1627,690 1765,690 cw(c1765,680) 1775,680 R19.1
NetU1_17: U1.17 U3.20 | length 1325.9
  Top Layer w10: U3.20 601.93,1521.93 ccw(c601.93,1545) 625,1545 625,1660 cw(c655,1660) 655,1690 820,1690 ccw(c820,1705) 835,1705 835,1850.34 cw(c869.66,1850.34) 869.66,1885 1070,1885 cw(c1070,1870) 1085,1870 1085,1804.57 U1.17
NetU1_29: U1.29 U3.21 | length 914.8
  Top Layer w10: U3.21 175.28,1470 634.63,1470 ccw(c634.72,1489.8) 654.52,1489.57 ; 654.52,1489.59 656.95,1642.53 cw(c683.43,1642.17) 670,1665 675.38,1668.16 cw(c680.42,1659.53) 680.42,1669.53 U1.29
NetU1_30: U1.30 U3.22 | length 946.8
  Top Layer w10: U3.22 685,1421.93 ccw(c685,1431.93) 695,1431.93 695,1615 cw(c730,1615) 730,1650 890.43,1650 U1.30
NetU1_31: U1.31 U3.23 | length 984
  Top Layer w10: U3.23 701.62,1371.93 ccw(c701.62,1390.31) 720,1390.31 720,1620.16 cw(c730,1620.16) 730,1630.16 U1.31
NetU3_24: U3.24
NetU6_8: U6.8
NetU6_9: U6.9
OSCIN: C12.1 R7.2 U1.5 Y1.1 | length 466.2
  Top Layer w10: U1.5 1339.53,1610.47 cw(c1339.53,1580) R7.2
  Top Layer w20: R7.2 ccw(c1415,1580) 1415,1535 Y1.1 v2(1505,1595)
  Bottom Layer w20: C12.1 1465.2,1555.2 cw(c1505,1555.2) v2(1505,1595)
OSCOUT: C14.1 R7.1 U1.6 Y1.2 | length 468
  Top Layer w10: U1.6 1345.36,1630.16 ccw(c1345.36,1654.8) R7.1
  Top Layer w20: R7.1 cw(c1420.2,1654.8) 1420.2,1705 Y1.2 v2(1505,1645)
  Bottom Layer w20: C14.1 1470.2,1679.8 ccw(c1505,1679.8) v2(1505,1645)
PC13: R8.2 U1.2 | length 418.2
  Top Layer w10: U1.2 1260,1551.42 cw(c1260,1541.42) 1270,1541.46 1270,1355 ccw(c1280,1355) 1280,1345 1400.86,1345 cw(c1400.86,1335) 1407.93,1342.07 R8.2
PC14: C13.1 U1.3 Y.1 | length 788.2
  Top Layer w10: U1.3 1273.9,1571.1 cw(c1273.9,1555) 1290,1555 1290,1379.96 ccw(c1300,1380) 1299.96,1370 1610,1370 cw(c1610,1335) 1645,1335 v2(1645,1275)
  Bottom Layer w20: v2(1645,1275) 1645,1182.23 C13.1
PC15: C15.1 U1.4 Y.4 | length 926.4
  Top Layer w10: U1.4 1222.39,1590.28 1222.39,1590.06 ccw(c1223.46,1600) 1223.41,1590 1285,1590 cw(c1285,1565) 1310,1565 1310,1420 ccw(c1335,1420) 1335,1395 1745,1395 cw(c1745,1370.98) 1769.02,1370.98 Y.4 1769.02,1275.98 ccw(c1770,1275.98) v2(1770,1275)
  Bottom Layer w20: v2(1770,1275) 1770,1182.23 C15.1
RESET: C1.2 R3.1 RESET.2 U1.7 | length 845.7
  Top Layer w12: U1.7 1308.03,1650.07 ccw(c1308,1662.07) 1320,1661.93 1320,1662 1320,1763 cw(c1332,1763) 1332,1775 1520,1775 ccw(c1520,1779.87) 1524.87,1779.87 1524.87,1830 C1.2
  Top Layer w20: RESET.2 1402.2,1912.01 cw(c1400,1912.01) R3.1 1435.2,1909.8 cw(c1435.2,1885) 1460,1885 1460,1845 ccw(c1475,1845) 1475,1830 1522.44,1830 ccw(c1522.44,1832.43) C1.2
SWCLK: P2.2 U1.37 | length 345
  Top Layer w12: U1.37 946.73,1346.95 ccw(c958.73,1347) 958.68,1335 1090,1335 cw(c1090,1315) 1110,1315 P2.2
SWDIO: P2.3 U1.34 | length 610
  Top Layer w12: 845,1554.65 cw(c833,1554.56) 845,1554.56 845,1237 ccw(c857,1237) 857,1225 998.05,1225 ccw(c998,1237) 1010,1237 P2.3@1010,1295.92 ; 845,1554.7 cw(c861.36,1554.61) 862.48,1570.93 888.39,1570.93 ccw(c888.39,1582.93) U1.34
VBAT: U1.1
VCC: Buck-Boost.2 C16.1 C17.1 R18.1 R19.2 U5.10
VCC3V3: C2.2 C3.1 C8.2 C9.2 C10.2 C11.2 L1.1 L2.1 L3.2 P1.1 P1.2 P2.4 R3.2 R13.1 R14.2 R16.2 U1.9 U1.24 U1.36 U1.48 U3.25 U6.1 U6.6 | length 6568.7
  Top Layer w10: U1.36 916.38,1531.73 916.83,1531.73 920.39,1531.73 921.42,1531.73 933.21,1531.73 936.22,1531.73 1133.79,1531.73 cw(c1133.69,1509.61) 1133.84,1531.73 cw(c1133.69,1509.61) 1140.03,1530.81 ccw(c1142.83,1540.4) 1140.93,1530.59 1142.87,1530.22 ; v2(901.39,1838.61) 936.73,1838.61 cw(c936.73,1828.61) 946.19,1831.85 946.22,1830.28 U1.24 947.24,1803.39 cw(c937.91,1799.87) 947.91,1799.87 947.91,1799.32 ccw(c1006.85,1799.25) 947.91,1799.14 947.91,1769.77 ccw(c957.91,1769.83) 951.69,1762 ccw(c973.07,1789.24) 960.48,1756.98 cw(c956.78,1747.69) 965.05,1753.32 969.75,1746.4 cw(c961.49,1740.78) 971.49,1740.78 971.49,1550.58 cw(c961.49,1550.58) 970.52,1546.28 cw(c945.19,1558.48) 953.85,1531.73 ; 1142.9,1530.22 cw(c1141.01,1520.4) 1143.1,1530.18 1143.69,1530.05 cw(c1141.61,1520.27) 1145.92,1529.29 ; 1145.96,1529.27 cw(c1133.26,1503.39) U1.48@1162.09,1503.39 ; U1.48 1163.27,1503.39 1163.27,1673.27 cw(c1180,1673.27) 1180,1690 1218.78,1690 cw(c1218.78,1689.21) U1.9
  Top Layer w12: U1.36 890.43,1299.57 ccw(c910,1299.57) P2.4 ; U1.48 1163.27,880.81 ccw(c1175.27,880.86) 1175.22,868.86 L3.2 1235,1099.73 cw(c1280.27,1099.73) 1280.27,1145 L1.1 L2.1 ; U1.9 cw(c1221.6,1677.39) 1221.56,1689.39 1247.52,1689.39 ccw(c1247.52,1706.14) 1251,1689.75 cw(c1253.43,1678) 1253.21,1690 cw(c1253.43,1678) 1253.38,1690 1253.6,1690.01 ccw(c1253,1702) 1258.44,1691.3 ccw(c1253,1702) 1265,1702 1265,1800 cw(c1300,1800) 1300,1835 R3.2@1390.97,1835
  Top Layer w20: U3.25 ccw(c154.45,1271.93) 154.45,1270 v3(215,1270) ; R3.2 1390.97,1835 cw(c1390.97,1895.97) 1330,1895.97 1330,2115.06 cw(c1350,2115) 1349.94,2135 1440,2135 cw(c1440,2115) 1460,2115 1460,1994.94 ccw(c1480,1995) 1479.94,1975 1755,1975 cw(c1755,1955) 1775,1955 1775,1738.17 cw(c1755,1738.23) P1.2 P1.1
  Bottom Layer w12: 297.66,1503.16 cw(c309.66,1503.16) 309.66,1515.16 414.15,1515.16 cw(c414.15,1502.76) 426.55,1502.76 426.55,1485.86 ccw(c439.89,1485.86) 439.89,1472.52 U6.1
  Bottom Layer w20: v3(215,1270) 215,1325 215,1818.61 cw(c235,1818.61) 235,1838.61 C2.2 ; R14.2 297.66,1503.16 297.66,1569.65 cw(c301.52,1569.65) C3.1 301.52,1680.33 cw(c302.68,1680.33) R13.1 ; U6.6 354.16,1630 cw(c354.16,1681.49) R13.1 ; R16.2 649.5,1709.23 ccw(c622.18,1709.23) 622.18,1736.54 322.68,1736.54 ccw(c322.68,1716.54) 302.68,1716.54 R13.1 ; v2(901.39,1838.61) C9.2 C11.2 C10.2 C8.2 C2.2 ; C2.2 268.9,1715.27 ccw(c302.68,1715.27) R13.1
pads on no net: U1.10 U1.11 U1.12 U1.13 U1.14 U1.15 U1.16 U1.18 U1.19 U1.21 U1.22 U1.25 U1.26 U1.27 U1.28 U1.32 U1.33 U1.38 U1.39 U1.40 U1.41 U1.45 U1.46 U3.1 U3.3 U3.4 U3.5 U3.6 U3.7 U6.3 U6.10 U6.11 Y.2 Y.3
copper on no net:
  other v4: 70,20 1820,20 1820,2200 70,2210

## Polygon pours and split planes (outlines as drawn)
GND on Bottom Layer "GND_L02_P000" (solid, remove dead copper, pour order 0): 50,2270 1835,2270 cw(c1835,2220) 1885,2220 1885,0 cw(c1835,0) 1835,-50 50,-50 cw(c50,0) 0,0 0,2220 cw(c50,2220)
GND on Top Layer "GND_L01_P001" (solid, remove dead copper, pour order 1): 50,2270 1835,2270 cw(c1835,2220) 1885,2220 1885,0 cw(c1835,0) 1835,-50 50,-50 cw(c50,0) 0,0 0,2220 cw(c50,2220)

## Keep-outs
Keep-Out Layer:
  lines w10: 0,0 ccw(c50,0) 50,-50 1835,-50 ccw(c1835,0) 1885,0 1885,2220 ccw(c1835,2220) 1835,2270 710,2270 50,2270 ccw(c50,2220) 0,2220 0,0

## Other copper
Top Layer:
  region net NetL4_2: 1084.62,1096.1 cw(c1084.62,1076.1) 1104.62,1076.1 1104.62,861.1 cw(c1084.62,861.1) 1084.62,841.1 1014.62,841.1 ccw(c1014.62,821.1) 994.62,821.1 994.62,641.1 cw(c979.62,641.1) 979.62,626.1 649.62,626.1 cw(c649.62,641.1) 634.62,641.1 cw(c644.62,641.1) 644.62,651.1 794.62,651.1 ccw(c794.62,661.1) 804.62,661.1 804.62,826.1 cw(c819.62,826.1) 819.62,841.1 949.62,841.1 ccw(c949.62,851.1) 959.62,851.1 959.62,1086.1 cw(c969.62,1086.1) 969.62,1096.1
  region net NetD1_1: 480,1095 ccw(c480,1075) 460,1075 460,840 ccw(c475,840) 475,825 575,825 ccw(c575,835) 585,835 585,860 cw(c595,860) 595,870 905,870 ccw(c905,880) 915,880 915,1090 ccw(c910,1090) 910,1095
  region net NetC22_1: 940,75 ccw(c950,75) 950,65 1165,65 ccw(c1165,80) 1180,80 1180,595 ccw(c1160,595) 1160,615 645,615 ccw(c645,605) 635,605 635,600 ccw(c645,600) 645,590 805,590 cw(c805,580) 815,580 815,435 ccw(c825,435) 825,425 930,425 cw(c930,415) 940,415
  region net NetC20_1: 295,660 ccw(c295,665) 300,665 300,790 ccw(c290,790) 290,800 140,800 ccw(c140,785) 125,785 125,75 ccw(c135,75) 135,65 290,65 ccw(c290,75) 300,75 300,325 ccw(c290,325) 290,335 215,335 cw(c215,350) 200,350 200,655 cw(c205,655) 205,660
  region net VCC: 1430,340 1410,320 1410,70 1415,65 1555,65 ccw(c1555,75) 1565,75 1565,300 cw(c1575,300) 1575,310 1720,310 ccw(c1720,325) 1735,325 1735,425 ccw(c1715,425) 1715,445 1585,445 ccw(c1585,435) 1575,435 1575,360 1555,340
  region net NetL7_2: 1475,435 cw(c1465,435) 1465,425 1240,425 cw(c1242.5,432.5) 1235,435 1235,510 cw(c1247.5,512.5) 1245,525 1325,525 ccw(c1325,535) 1335,535 1335,570 cw(c1360,570) 1360,595 1545,595 1545,590 cw(c1540,590) 1540,585 1480,585 ccw(c1480,580) 1475,580
  region net VCC: 1735,505 1735,515 cw(c1750,515) 1750,530 1805,530 ccw(c1805,545) 1820,545 1820,595 ccw(c1815,595) 1815,600 1720,600
  region net VCC: 1735,410 cw(c1715,410) 1715,390 1595,390 cw(c1595,410) 1575,410 1575,520 ccw(c1560,520) 1560,535 1510,535 cw(c1510,550) 1495,550 1495,570 cw(c1500,570) 1500,575 1545,575 cw(c1545,570) 1550,570 1550,560 ccw(c1555,560) 1555,555 1625,555 ccw(c1625,570) 1640,570 1640,595 cw(c1645,595) 1645,600 1720,600 cw(c1720,585) 1735,585

## Silkscreen, mask and mechanical layers (free items; w line width, h text height)
Top Overlay:
  text "Designed by Cuong" at 195.43,2203.89 h30
  text "+    -" at 1500.24,21.85 h25
  text "+     -" at 217.92,15.55 h25
  text "-    +" at 876.42,13.15 h25

## Text inside footprints (layer, text, board x,y; h text height)
P1: Top Overlay "1" at 1662.5,1800.83 h25 r270; Top Overlay "2" at 1762.5,1816.67 h25 r270; Top Overlay "5" at 1662.5,1456.67 h25 r270; Top Overlay "6" at 1762.5,1456.67 h25 r270